# EAGLE board h_bridge_v2 (EAGLE 5.11)
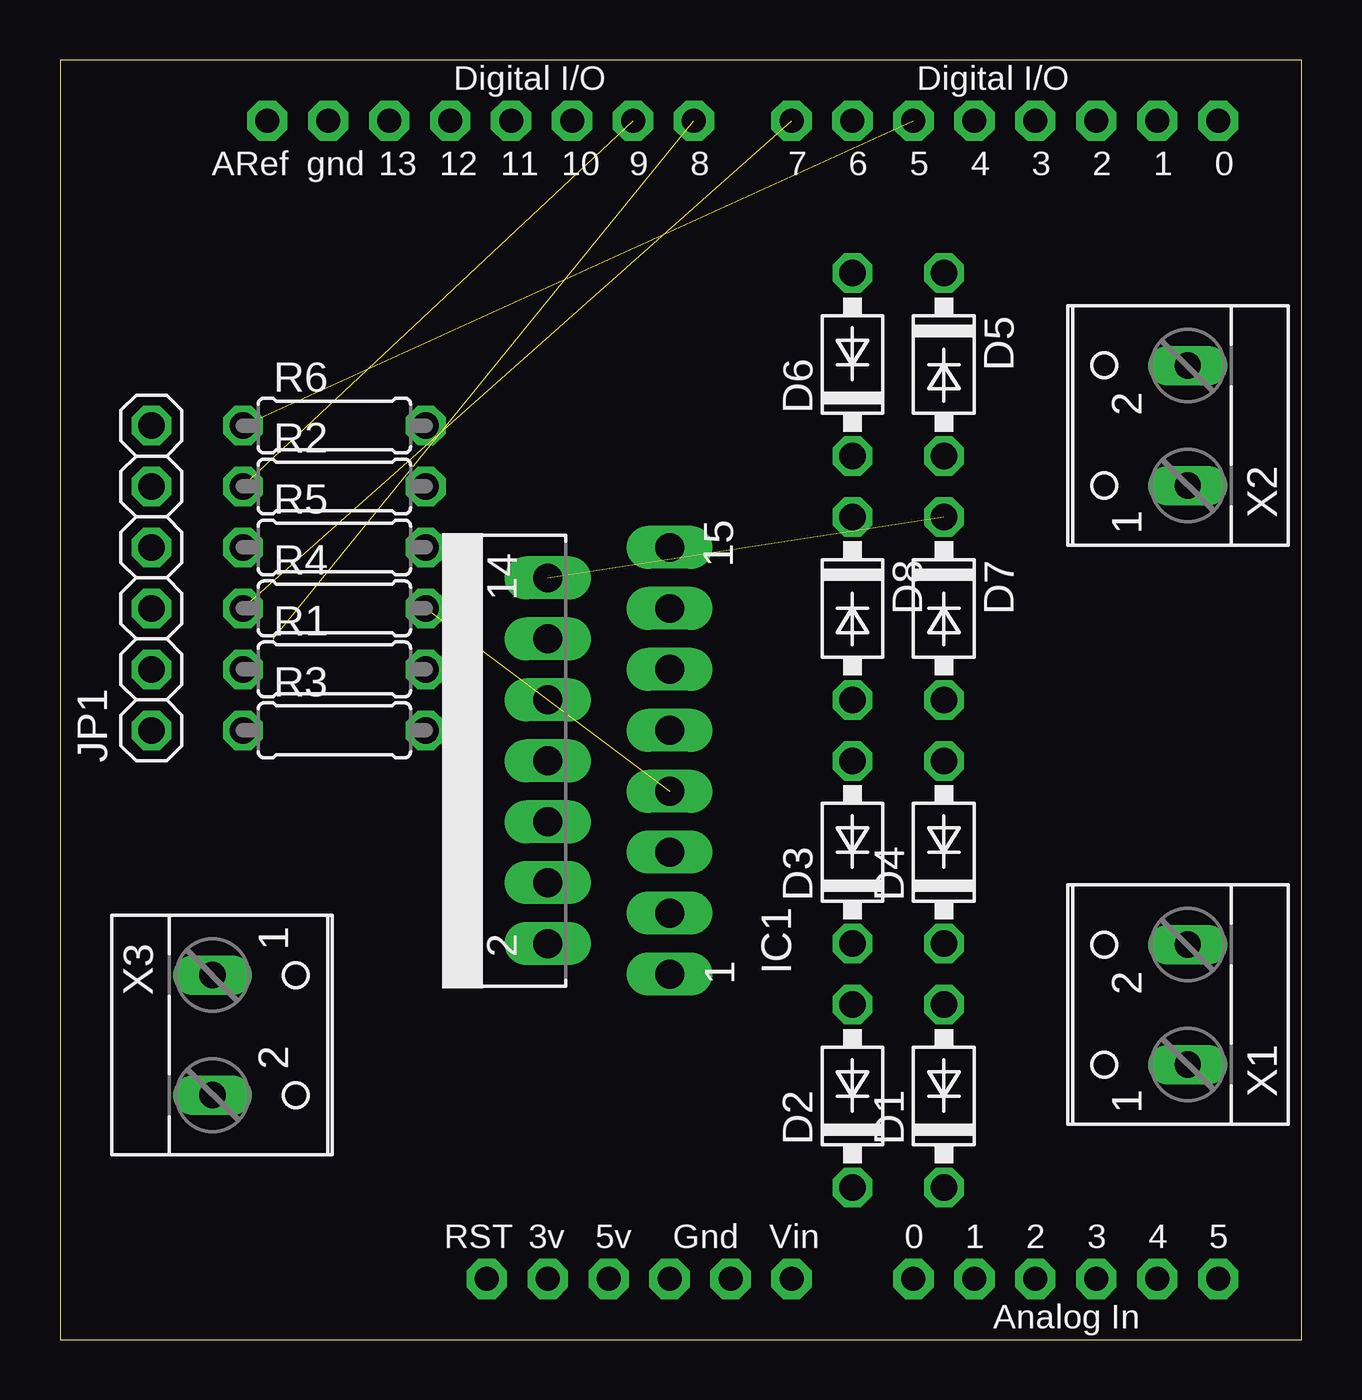
[diagram p0: board, top side]
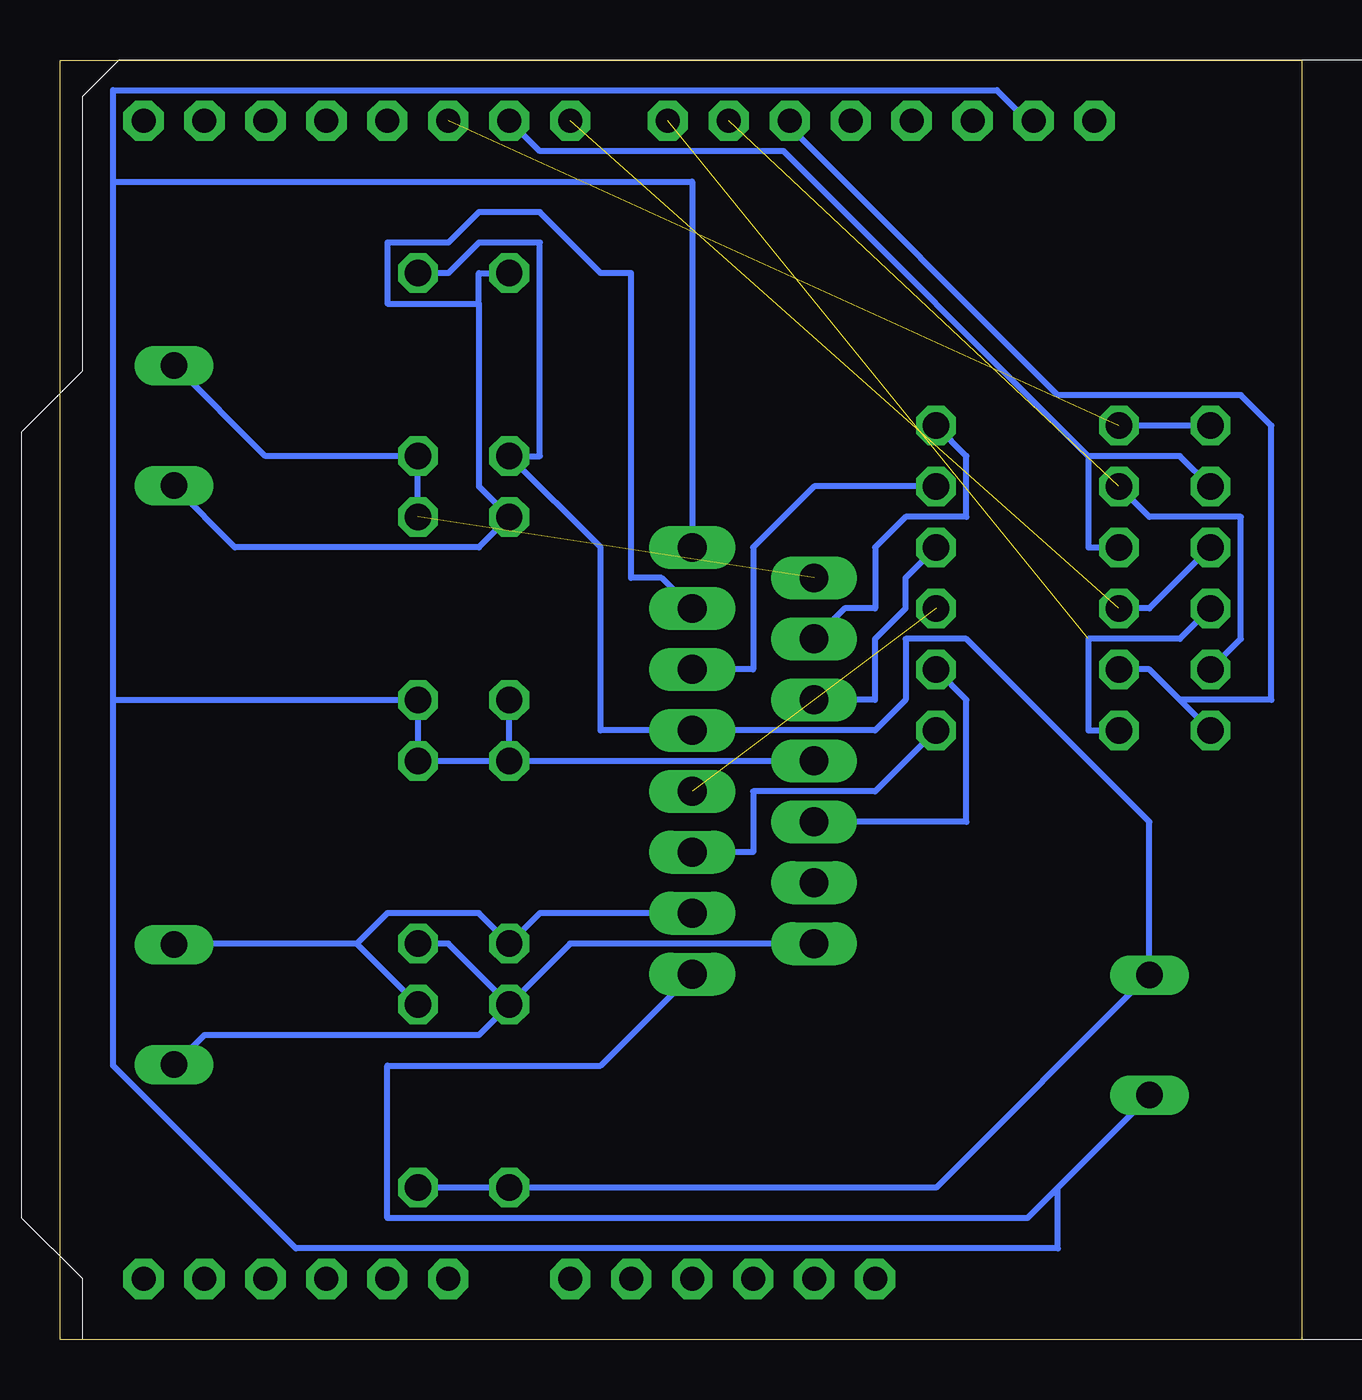
[diagram p1: board, bottom side, seen from below]

Size 51.74 x 53.33 mm. Coordinates in mm from the lower left corner, seen from the top.
Outline: 0,0 51.74,0 51.74,53.33 0,53.33 0,0
Copper layers (1*16): Top 0.035mm / dielectric 1.5mm / Bottom 0.035mm
Design rules "default": minimum track width 10mil, minimum drill 24mil, track to track 8mil, track to pad 8mil, pad to pad 8mil, via to via 8mil, smd to smd 8mil, copper to edge 40mil, drill to drill 8mil, minimum pad ring 10mil, minimum via ring 8mil, stop-mask expansion 4mil, vias tented up to drill 0mil, thermal gap 10mil

## Footprints (pad centres in the part's own frame; a part is rotated, then mirrored left to right if it is on the bottom)
DO41-10 = drill 1.1 octagon: A 3.81,0; C -3.81,0
MULTIWATT-15 = drill 1.2 long: 1 -8.89,-7.62; 2 -7.62,-2.54; 3 -6.35,-7.62; 4 -5.08,-2.54; 5 -3.81,-7.62; 6 -2.54,-2.54; 7 -1.27,-7.62; 8 0,-2.54; 9 1.27,-7.62; 10 2.54,-2.54; 11 3.81,-7.62; 12 5.08,-2.54; 13 6.35,-7.62; 14 7.62,-2.54; 15 8.89,-7.62
1X06 = drill 1.1 octagon: 1 -6.35,0; 2 -3.81,0; 3 -1.27,0; 4 1.27,0; 5 3.81,0; 6 6.35,0
0207/7 = drill 1.1 octagon: 1 -3.81,0; 2 3.81,0
ARDUINO-NOHOLE = drill 1 pad 1.676 octagon: 3V 35.56,2.54; 5V 38.1,2.54; A0 50.8,2.54; A1 53.34,2.54; A2 55.88,2.54; A3 58.42,2.54; A4 60.96,2.54; A5 63.5,2.54; AREF 23.876,50.8; D0 63.5,50.8; D1 60.96,50.8; D2 58.42,50.8; D3 55.88,50.8; D4 53.34,50.8; D5 50.8,50.8; D6 48.26,50.8; D7 45.72,50.8; D8 41.656,50.8; D9 39.116,50.8; D10 36.576,50.8; D11 34.036,50.8; D12 31.496,50.8; D13 28.956,50.8; GND 26.416,50.8; GND1 43.18,2.54; GND2 40.64,2.54; RESET 33.02,2.54; VIN 45.72,2.54
W237-102 = drill 1.1 long: 1 -2.5,-1.27; 2 2.5,-1.27

## Placement (x,y rotation side)
D1  1N4004A  [DO41-10]  36.83,10.16 90 top
D2  1N4004A  [DO41-10]  33.02,10.16 90 top
D3  1N4004A  [DO41-10]  33.02,20.32 90 top
D4  1N4004A  [DO41-10]  36.83,20.32 90 top
D5  1N4004A  [DO41-10]  36.83,40.64 270 top
D6  1N4004A  [DO41-10]  33.02,40.64 90 top
D7  1N4004A  [DO41-10]  36.83,30.48 270 top
D8  1N4004A  [DO41-10]  33.02,30.48 270 top
IC1  L298  [MULTIWATT-15]  17.78,24.13 90 top
JP1  [1X06]  3.81,31.75 90 top
R1  [0207/7]  11.43,27.94 0 top
R2  [0207/7]  11.43,35.56 0 top
R3  [0207/7]  11.43,25.4 0 top
R4  [0207/7]  11.43,30.48 0 top
R5  [0207/7]  11.43,33.02 0 top
R6  [0207/7]  11.43,38.1 0 top
U$1  ARDUINO-NOHOLE  [ARDUINO-NOHOLE]  -15.24,0 0 top
X1  [W237-102]  45.72,13.97 90 top
X2  [W237-102]  45.72,38.1 90 top
X3  [W237-102]  7.62,12.7 270 top

## Library data of the parts
D1-D8 JP1 R1-R6 U$1 X1-X3 = h_bridge_v2
IC1 = h_bridge_v2; MPN: L298N; OC_FARNELL: 1589425; OC_NEWARK: 32M1527

## Nets
3V: U$1.3V
5V: U$1.5V
+5V: IC1.4
+12V: D1.C D2.C D5.C D6.C IC1.9 X3.1
GND: D3.A D4.A D7.A D8.A IC1.1 IC1.8 IC1.15 U$1.GND X3.2
GND1: U$1.GND1
GND2: U$1.GND2
IN_A1: JP1.3 R3.1 U$1.D8
IN_A2: JP1.4 R4.1 U$1.D7
IN_B1: JP1.5 R5.1 U$1.D6
IN_B2: JP1.6 R6.1 U$1.D5
N$1: IC1.6 R1.2
N$2: IC1.11 R2.2
N$3: IC1.5 R3.2
N$4: IC1.7 R4.2
N$5: IC1.10 R5.2
N$6: IC1.12 R6.2
OUT1: D2.A D4.C IC1.2 X1.1
OUT2: D1.A D3.C IC1.3 X1.2
OUT3: D6.A D8.C IC1.13 X2.1
OUT4: D5.A D7.C IC1.14 X2.2
PWM_A: JP1.1 R1.1 U$1.D10
PWM_B: JP1.2 R2.1 U$1.D9
VIN: U$1.VIN

## Tracks (layer width: path | path; a pad name or v marks a point on that pad's centre or on a via)
+12V
  Bottom 0.254: D5.C 35.56,44.45 34.29,45.72 31.75,45.72 31.75,36.83 D6.C 29.21,33.02 29.21,25.4 IC1.9 17.78,25.4 16.51,26.67 16.51,29.21 13.97,29.21 6.35,21.59 6.35,15.24 | D1.C D2.C 15.24,6.35 6.35,15.24 | X3.1 6.35,15.24
GND
  Bottom 0.254: 10.16,6.35 11.43,5.08 38.1,5.08 38.1,11.43 29.21,11.43 IC1.1 | 10.16,6.35 6.35,10.16 X3.2 | D3.A D8.A | D3.A IC1.8 | 49.53,26.67 49.53,48.26 | 49.53,48.26 49.53,52.07 12.7,52.07 11.43,50.8 U$1.GND | 49.53,26.67 D7.A D4.A D3.A | IC1.15 25.4,48.26 49.53,48.26 | 10.16,6.35 10.16,3.81 41.91,3.81 49.53,11.43 49.53,26.67
IN_A1  (1 unrouted)
  Bottom 0.254: JP1.3 5.08,29.21 8.89,29.21 8.89,25.4 R3.1
IN_A2  (1 unrouted)
  Bottom 0.254: JP1.4 6.35,30.48 R4.1
IN_B1
  Bottom 0.254: JP1.5 5.08,36.83 8.89,36.83 | 8.89,36.83 8.89,33.02 R5.1 | U$1.D6 31.75,49.53 21.59,49.53 8.89,36.83
IN_B2  (1 unrouted)
  Bottom 0.254: JP1.6 R6.1
N$1
  Bottom 0.254: R1.2 13.97,26.67 13.97,21.59 IC1.6
N$2
  Bottom 0.254: R2.2 20.32,35.56 22.86,33.02 22.86,27.94 IC1.11
N$3
  Bottom 0.254: R3.2 17.78,22.86 22.86,22.86 22.86,20.32 IC1.5
N$4  (1 unrouted)
N$5
  Bottom 0.254: R5.2 16.51,31.75 16.51,30.48 17.78,29.21 17.78,26.67 IC1.10
N$6
  Bottom 0.254: R6.2 13.97,36.83 13.97,34.29 16.51,34.29 17.78,33.02 17.78,30.48 19.05,30.48 IC1.12
OUT1
  Bottom 0.254: D2.A 35.56,16.51 D4.C | D2.A 34.29,12.7 45.72,12.7 46.99,11.43 X1.1 | IC1.2 30.48,16.51 D2.A
OUT2
  Bottom 0.254: IC1.3 31.75,17.78 D3.C 34.29,17.78 38.1,17.78 39.37,16.51 | 39.37,16.51 D1.A | 39.37,16.51 46.99,16.51 X1.2
OUT3
  Bottom 0.254: 34.29,43.18 34.29,44.45 D6.A | 34.29,43.18 34.29,35.56 D8.C 34.29,33.02 44.45,33.02 46.99,35.56 X2.1 | IC1.13 26.67,31.75 27.94,31.75 27.94,44.45 29.21,44.45 31.75,46.99 34.29,46.99 35.56,45.72 38.1,45.72 38.1,43.18 34.29,43.18
OUT4  (1 unrouted)
  Bottom 0.254: D7.C D5.A 43.18,36.83 46.99,40.64 X2.2
PWM_A
  Bottom 0.254: 5.08,26.67 6.35,27.94 R1.1 | 5.08,26.67 JP1.1 | 5.08,26.67 1.27,26.67 1.27,38.1 2.54,39.37 10.16,39.37 21.59,50.8 U$1.D10
PWM_B  (1 unrouted)
  Bottom 0.254: JP1.2 2.54,29.21 2.54,34.29 6.35,34.29 R2.1